# Altium PCB LTE_GPS_433_V1.0.PcbDoc (part 2 of 2)
Units mil, origin at the board's own origin, x right, y up, seen from the top; angles counter-clockwise.
Board outline 3937.01 x 2362.2 mil, 4 copper layers (Top Layer, GND, POWER, Bottom Layer); 259 components, 188 nets, 896 pads, 488 vias.
Unrouted connection lines stored in the file: 33.
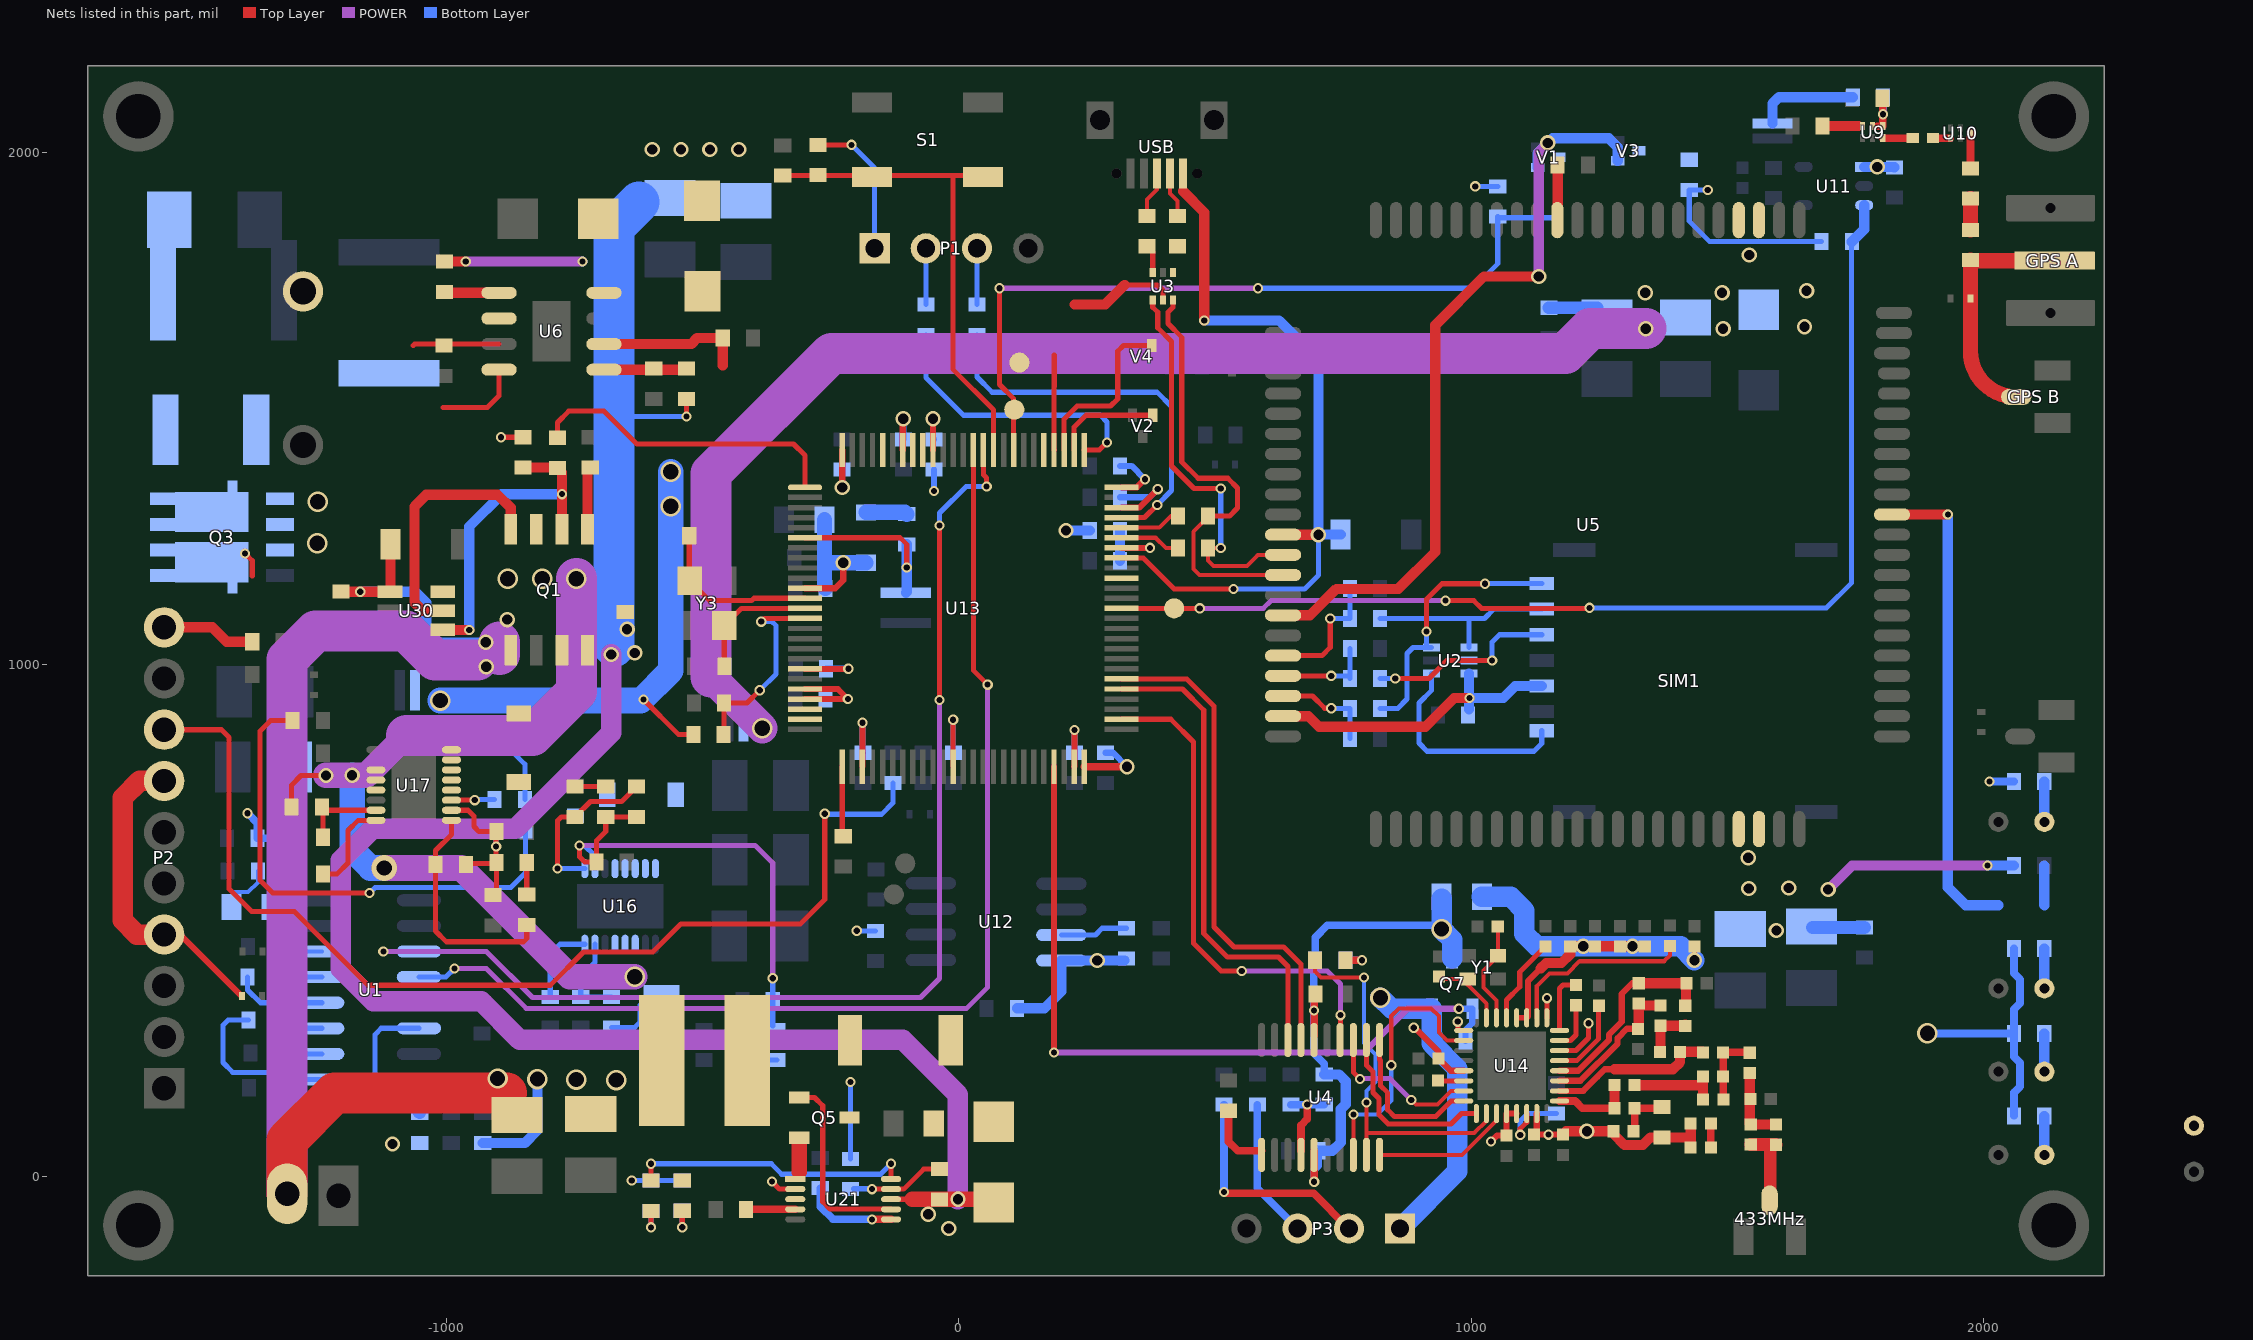
[diagram p4: the nets of this part, all layers, seen from the top]

## Via types
v1: diameter 20, hole 12, Top Layer to Bottom Layer, tented both sides, 347 vias
v2: diameter 30, hole 20, Top Layer to Bottom Layer, tented both sides, 110 vias
v3: diameter 40, hole 30, Top Layer to Bottom Layer, tented both sides, 20 vias
v4: diameter 25.98, hole 12.99, Top Layer to Bottom Layer, tented top, 8 vias
v5: diameter 16, hole 8, Top Layer to Bottom Layer, tented both sides, 1 vias
v6: diameter 50, hole 30, Top Layer to Bottom Layer, tented both sides, 1 vias
v7: diameter 59.06, hole 39.37, Top Layer to Bottom Layer, 1 vias

## Nets (pads, with @x,y where several pads share a name; then routed paths per layer and width w, separated by ;. In a path a pad name is that pad's centre, name@x,y a point inside that pad or via, vN(x,y) a via of type N, cw(c..) or ccw(c..) an arc to the next point about the centre after c; other vN are vias at no path point) (continued)
Net433_1: 433.1 R38.2 | length 79.1
  Bottom Layer w20: R38.2@2119.06,772 2119.06,693.26 433.1@2119.32,693
Net433MHz_1: 433MHz.1 C21.2 L7.1 | length 158.2
  Top Layer w25: L7.1@1546,63 1594.63,63 C21.2@1595,62.63 ; 433MHz.1@1583,-46 1584,-45 C21.2@1584,62.63
NetACPR_1: ACPR.1 R74.2 | length 64.4
  Top Layer w10: v1(-601.35,-98.65) ACPR.1@-601.35,-66.45
  Bottom Layer w10: v1(-601.35,-98.65) R74.2@-601.35,-66.45
NetACPR_2: ACPR.2 U21.10 | length 548.5
  Top Layer w10: ACPR.2@-601.35,-7.39 v1(-601.35,25.65) ; U21.10@-132.68,-4.35 v1@-132.68,25.33
  Bottom Layer w10: v1(-601.35,25.65) -366.65,25.65 -346,5 -153.33,5 v1(-132.68,25.65)
NetAdapter_1: Adapter.1 F1.1
NetBACK_1: BACK.1 R39.2 | length 76.1
  Bottom Layer w20: R39.2@2119.06,119 2119.06,43.26 BACK.1@2119.32,43
NetC2_1: C2.1 U14.31 Y1.3 | length 149.3
  Top Layer w8: C2.1@937,391 941.64,386.36 Y1.3@993.47,386.36 993.47,374.32 1029.79,338 U14.31@1029.79,310.5
NetC3_1: C3.1 U14.30 Y1.1 | length 215.9
  Top Layer w8: 1024,374.22 1024,389 ; U14.30@1049.47,310.5 1049.47,344.53 1024,370 1024,389 ; C3.1@1052,489 1052.53,488.47 Y1.1@1052.53,431.64 1024,403.11 1024,389
NetC4_1: C4.1 U14.29 | length 170.9
  Top Layer w10: U14.29@1069.16,310.5 1069.16,345.16 1095,371 1095,400 C4.1@1145,450
NetC7_1: C7.1 U14.26 | length 365.3
  Top Layer w8: U14.26@1128.21,310.5 1128.21,372.34 1152.87,397 1188,397 1212,421 1377,421 1388,432 C7.1@1388,451
NetC11_1: C11.1 U14.23 | length 109.8
  Top Layer w10: U14.23@1172.5,266.21 1194.21,266.21 1205,277 1205,312 ; 1205,297.21 1205,312 ; C11.1@1205,335 1205,312
NetC11_2: C11.2 U14.24 | length 116.9
  Top Layer w10: U14.24@1172.5,285.9 1172.5,367.5 1179.37,374.37 C11.2@1205,374.37
NetC12_2: C12.2 L1.1 L2.1 U14.20 | length 398.7
  Top Layer w12: U14.20@1172.5,207.16 1209.16,207.16 1269,267 1269,277.74 1294,302.74 1294,357.3 1314.7,378 L2.1@1327.35,378
  Top Layer w20: L2.1@1327.35,378 1416.37,378 1419.37,375 1419.37,335.37 L1.1@1418,334
NetC14_1: C14.1 U14.21 | length 159
  Top Layer w10: U14.21@1172.5,226.84 1206.22,226.84 1249,269.63 1249,333 C14.1@1250,334
NetC15_1: C15.1 L1.2 L4.2 | length 100.7
  Top Layer w20: L4.2@1368.63,244 1370,245.37 C15.1@1370,295 1415.37,295 L1.2@1418,297.63
NetC15_2: C15.2 L2.2 L3.1 U14.19 | length 296.4
  Top Layer w12: U14.19@1172.5,187.47 1213.51,187.47 1286,259.96 1286,270.7 1304.3,289 L3.1@1326,289
  Top Layer w20: L3.1@1326,289 1327.35,290.35 L2.2@1327.35,338.63 1331.61,334.37 C15.2@1370,334.37
NetC17_2: C17.2 U14.6 | length 50.3
  Top Layer w10: C17.2@935.37,188 935.9,187.47 U14.6@985.5,187.47
NetC18_1: C18.1 C20.2 L5.1 L6.2 | length 144.4
  Top Layer w15: C20.2@1492.37,151 1492,151.37 L5.1@1492,196 C18.1@1492,243 1543.37,243 L6.2@1544,242.37
NetC18_2: C18.2 L4.1 U14.18 | length 323.9
  Top Layer w12: U14.18@1172.5,167.79 1218.79,167.79 1246.19,195.19 1246.19,195.37 1260.82,210 1280,210
  Top Layer w20: 1280,210 1394,210 1408,224 L4.1@1408,244 1451.63,244 C18.2@1452.63,243
NetC19_1: C19.1 L12.1 U14.17 | length 147.3
  Top Layer w15: U14.17@1172.5,148.1 1202.9,148.1 1217,134 L12.1@1269,134
  Top Layer w20: L12.1@1280,134 C19.1@1280,179
NetC19_2: C19.2 C20.1 L5.2 | length 169.8
  Top Layer w20: C19.2@1319.37,179 1444,179 ; L5.2@1452.63,196 1452.63,151.37 C20.1@1453,151
NetC21_1: C21.1 C23.2 L6.1 L7.2 | length 150.6
  Top Layer w20: L6.1@1544,203 1544,104.37 L7.2@1546,102.37 1594.63,102.37 C21.1@1595,102
NetC33_1: C33.1 R21.1 U9.4 U9.5 | length 100.4
  Top Layer w15: 1793,2051.62 U9.4@1803.69,2051.62 C33.1@1803.69,2108
  Bottom Layer w15: v1(1804.32,2074.63) R21.1@1804.32,2108
NetC35_1: C35.1 R22.2 | length 60.6
  Top Layer w30: R22.2@1975,1849.06 C35.1@1975,1909.68
NetC35_2: C35.2 U10.1 | length 68.6
  Top Layer w15: C35.2@1975,1969.37 U10.1@1975,2038
NetC36_1: C36.1 U9.6 | length 69.3
  Top Layer w20: C36.1@1686.69,2051.62 1756,2051.62
NetC37_1: C37.1 D9.2 L9.1 U6.8 | length 269.4
  Top Layer w20: C37.1@-1004.42,1787 v1(-963,1787)
  POWER w20: v1(-963,1787) v1(-735,1787)
NetC37_2: C37.2 U6.1 | length 107.2
  Top Layer w20: C37.2@-1004.42,1727.94 -1002.47,1726 U6.1@-898.05,1726
NetC40_1: C40.1 C41.1 C161.2 D12.K L17.1 Q1.5 R27.2 U30.1 VBAT.2 | length 2783.4
  Top Layer w20: C161.2@-1207,1143.06 -1206.48,1142.53 v1(-1169,1142.53) U30.1@-1110.97,1142.53 -1109.8,1143.71 D12.K@-1109.8,1235
  Top Layer w80: VBAT.2@-1311.68,-33.06 -1311.68,71.32 -1219,164 -883,164
  POWER w80: VBAT.2@-1311.68,-33.06 -1311.68,1010.32 -1256,1066 -1080,1066 -1023,1009 -940,1009 ; -897,1020 -897,1044
  Bottom Layer w20: v1(-1169,1142.53) -1061.53,1142.53 -1040,1121 -1040,1065 -1017.73,1042.73 -925.27,1042.73 v2(-924,1044) ; R27.2@-930,65.94 -848.06,65.94 -823,91 v3(-823,191)
  other v2: -923,996 -882,1088
  other v3: -669,189 -747,190 -901,192
NetC49_2: C49.2 U13.73 | length 165.6
  Top Layer w12: U13.73@317.37,1306.85 352.15,1306.85 v1(388,1342.7)
  Bottom Layer w12: C49.2@314.37,1327 372.3,1327 v1(388,1342.7)
NetC50_2: C50.2 U13.49 | length 115.9
  Top Layer w12: U13.49@224.85,800.95 225.32,801.41 v1(225.32,872.32)
  Bottom Layer w12: C50.2@225.32,828 v1(225.32,872.32)
NetC63_1: C63.1 Q3.1 Q3.2 Q3.3 U6.2
  other v3: -1253,1237 -1252,1318
NetC64_1: C64.1 U1.1 | length 334.3
  Bottom Layer w10: C64.1@-1387,306 -1427,306 -1437,296 -1437,223 -1418,204 -1307,204 -1293,190 U1.1@-1243.49,190
NetC64_2: C64.2 U1.3 | length 91.1
  Bottom Layer w10: C64.2@-1327.94,306 -1306,306 -1290,290 U1.3@-1243.49,290
NetC65_1: C65.1 U1.4 | length 180.9
  Bottom Layer w10: C65.1@-1389,390 -1389,365 -1364,340 U1.4@-1243.49,340
NetC65_2: C65.2 U1.5 | length 86.5
  Bottom Layer w10: C65.2@-1329.94,390 U1.5@-1243.49,390
NetC66_1: C66.1 U1.2 | length 81.3
  Bottom Layer w10: C66.1@-1324,242 -1322,240 U1.2@-1243.49,240
NetC67_1: C67.1 U1.6 | length 89.7
  Bottom Layer w8: C67.1@-1329,450 -1301,450 -1291,440 U1.6@-1243.49,440
NetC70_1: C70.1 U6.6 | length 290.7
  Top Layer w20: U6.6@-693.32,1626 -523,1626 -511,1638 C70.1@-461.34,1638 -461.34,1584.23
NetC73_2: C73.2 L12.2 R80.1 | length 100.3
  Top Layer w15: C73.2@1317.37,89 1319.37,91 L12.2@1319.37,134 1371,134 R80.1@1373,136
NetC74_1: C74.1 C83.1 | length 47
  Top Layer w15: C83.1@1468,57 C74.1@1468,104
NetC80_2: C80.2 R50.1 | length 71
  Bottom Layer w10: C80.2@-426.68,228 R50.1@-355.68,228
NetC81_1: C81.1 R55.1 | length 60
  Top Layer w10: R55.1@-749.68,762 C81.1@-689.69,762
NetC81_2: C81.2 C82.2 R49.1 R50.2 R58.2 U16.10 | length 987.5
  Top Layer w10: v1(-741,647) -741,625 -731,615 R58.2@-707.74,615 -707.74,656.26 -689.69,674.31 C81.2@-689.69,702.94 C82.2@-629.69,702.94
  POWER w10: v1(-741,647) -398,647 -363.68,612.68 v1(-363.68,387.68)
  Bottom Layer w10: v1(-741,647) -731,647 -710.9,626.9 U16.10@-710.9,601.82 ; R50.2@-363.68,295.05 R49.1@-363.68,344 v1(-363.68,387.68)
NetC82_1: C82.1 R55.2 U16.9 | length 328.4
  Top Layer w10: v1(-783.82,601.82) -783.82,695.18 -776.06,702.94 R55.2@-749.68,702.94 -719.63,733 -658.69,733 C82.1@-629.69,762
  Bottom Layer w10: v1(-783.82,601.82) U16.9@-730.58,601.82
NetC84_2: C84.2 R62.1 | length 992.3
  Top Layer w10: C84.2@-1301.06,891 -1344,891 -1365,870 -1365,579 -1340,554 v1(-1151,554)
  Bottom Layer w10: v1(-1151,554) -1140,565 -875,565 -846.68,593.32 R62.1@-846.68,677
NetC87_1: C87.1 R63.1 | length 63.3
  Top Layer w10: R63.1@-844.68,551 -844,551.68 C87.1@-844,614
NetC87_2: C87.2 C88.2 R61.1 R62.2 R66.2 U17.10 | length 334.1
  Top Layer w10: U17.10@-990.87,715.79 -958.79,715.79 -947,704 -947,684 -937,674 -903.74,674 v1(-903.74,645) -903.74,613 -904.74,612 C88.2@-960.63,612 ; R66.2@-910,550.06 -903.06,557 C87.2@-903.06,614
  Bottom Layer w10: R62.2@-905.74,677 -903.74,675 v1(-903.74,645)
NetC88_1: C88.1 R63.2 U17.9 | length 445.1
  Top Layer w10: U17.9@-990.87,696.1 -990.87,668.13 -1022,637 C88.1@-1022,610 -1022,480 -1001,459 -850,459 -844,465 R63.2@-844,491.94
NetC93_1: C93.1 D3.2 F1.2 Q3.5 Q3.6 Q3.7 Q3.8 | length 49.8
  Top Layer w10: v1(-1394,1217) -1380.06,1203.06 -1380.06,1173
NetC105_2: C105.2 D11.2 R71.2
NetC106_1: C106.1 R72.2 U21.9 | length 183.1
  Top Layer w10: v1(-169.97,-24.03) U21.9@-132.68,-24.03 -108.03,-24.03 -69,15 C106.1@-38,15
  Bottom Layer w10: R72.2@-205.63,-23.35 v1@-170.65,-23.35
NetC107_2: C107.2 U21.4 | length 96.5
  Top Layer w15: C107.2@-415.94,-64 -415.35,-63.4 U21.4@-319.68,-63.4
NetCE_1: CE.1 R25.1 U11.3 U13.63 | length 2205.7
  Top Layer w10: U13.63@317.37,1110 CE.1@420,1110 v1(470,1110) ; v1(950,1125) 1005,1125 1020,1110 v1@1231,1110
  POWER w10: v1(470,1110) 594,1110 609,1125 v1(950,1125)
  Bottom Layer w10: v1(1231,1111) 1694,1111 1743,1160 1743,1825.68 R25.1@1743.32,1826
  Bottom Layer w20: R25.1@1743.32,1826 1767.42,1850.11 U11.3@1767.42,1897.2
NetCHG_1: CHG.1 R73.2 | length 64.7
  Top Layer w10: v1(-540.43,-98.57) CHG.1@-540.43,-66.22
  Bottom Layer w10: v1(-540.43,-98.57) R73.2@-540.43,-66.22
NetCHG_2: CHG.2 U21.3 | length 77.6
  Bottom Layer w20: 2119.06,608 2119.06,530.76 2119.32,530.5
NetD2_K: D2.K U5.11 U13.68 USB.1 | length 1512.1
  Top Layer w10: U13.68@317.37,1208.43 360,1208.43 420.42,1148 v1(536,1148) ; 437.68,1924.32 USB.1@437.68,1959
  Top Layer w20: 437.68,1924.32 479,1883 v1(479,1672) ; U5.11@632.84,1253.8 v2(701.8,1253.8)
  Bottom Layer w10: v1(536,1148) 675,1148 701.8,1174.8 v2(701.8,1253.8)
  Bottom Layer w20: v1(479,1672) 625,1672 701.8,1595.2 v2(701.8,1253.8) 702,1254 D2.K@745.2,1254
NetD7_K: "GPS A.1" "GPS B.1" D7.K R22.1 | length 481.3
  Top Layer w30: R22.1@1975,1790 1975,1612.32 ccw(c2064.32,1612.32) 2064.32,1523 ; R22.1@1976,1789 2139.32,1789
NetD8_2: D8.2 R29.1 | length 81.1
  Bottom Layer w30: D8.2@-181.68,1297.43 -105.43,1297.43 R29.1@-102,1294
NetFB1_1: FB1.1 U1.16 | length 65.6
  Bottom Layer w25: U1.16@-1054.51,190 -1054.51,126.51 FB1.1@-1053,125
NetGPS_1: GPS.1 R37.2 | length 78.1
  Bottom Layer w20: R37.2@2119.06,446 2119.06,368.26 GPS.1@2119.32,368
NetIRQ_1: IRQ.1 R70.2 | length 65.1
  Top Layer w15: IRQ.1@754.43,423 v1(787,423)
  Bottom Layer w15: R70.2@754.43,423 v1(787,423)
NetL8_1: L8.1 U9.3 | length 58.6
  Top Layer w15: U9.3@1803.69,2028 L8.1@1862.32,2028
NetL8_2: L8.2 U10.4 | length 33.8
  Top Layer w15: L8.2@1901.84,2028.16 U10.4@1935.63,2028.16
NetL10_1: L10.1 U16.15 U16.16
NetL10_2: L10.2 U16.12 U16.13 U16.14
NetL11_1: L11.1 U17.15 U17.16
NetL11_2: L11.2 U17.12 U17.13 U17.14
NetL17_2: L17.2 Q5.2 U21.1 | length 58.3
  Top Layer w30: L17.2@-414.68,225.72 L17.2@-413.36,227.05 ; -312,9.56 Q5.2@-312,66
NETLIGHT: 1.2 U5.51 | length 950.1
  Top Layer w20: U5.51@1821.82,1293.17 v1(1930.83,1293.17)
  Bottom Layer w20: v1(1930.83,1293.17) 1930.83,565.17 1965.5,530.5 2029.55,530.5
NetP1_1: P1.1 R17.2
NetP1_2: P1.2 R9.2 | length 109.9
  Bottom Layer w10: R9.2@-64.68,1703.06 P1.2@-64.68,1813
NetP1_3: P1.3 R10.2 | length 109.9
  Bottom Layer w10: R10.2@35.32,1703.06 P1.3@35.32,1813
NetP2_8: P2.8 R5.2 | length 2088.5
  Top Layer w10: P2.8@-1552,873 -1440,873 -1425,858 -1425,562 -1381,518 -1297.79,518 -1217,437.21 -1153.79,374 -798,374 -733,439 -598,439 -543,494 -309.68,494 -262,541.68 v1(-262,709)
  Bottom Layer w10: v1(-262,709) -261,708 -151,708 -128.69,730.31 R5.2@-128.69,768.94
NetP2_10: P2.10 R1.2 | length 183.6
  Top Layer w20: P2.10@-1552,1073 -1458,1073 -1429.76,1044.76 R1.2@-1380.06,1044.76
NetP3_1: P3.1 R18.2 | length 90.9
  Top Layer w8: 367.32,1876 367.32,1908.32 386.5,1927.5 386.5,1959
NetP3_2: P3.2 R8.2 | length 444.2
  Top Layer w15: v1(517.32,-29.68) 519.61,-31.98 692.3,-31.98 P3.2@761.32,-101
  Bottom Layer w15: v1(517.32,-29.68) R8.2@517.32,141
NetP3_3: P3.3 R11.2 | length 274.6
  Bottom Layer w15: R11.2@582.65,141 582.65,-22.33 P3.3@661.32,-101
NetPWR_1: PWR.1 R36.2 | length 74.6
  Bottom Layer w20: R36.2@2119.06,280 2119.06,205.76 PWR.1@2119.32,205.5
NetQ1_2: Q1.2 R69.1 R118.1 U30.4 | length 639.1
  Top Layer w20: U30.4@-1007.82,1067.73 v1(-956.27,1067.73) ; R69.1@-851.03,1384.94 -784.94,1384.94 R118.1@-784,1384 ; Q1.2@-775.38,1264.4 v1(-775.38,1333) R118.1@-775.38,1375.38
  Bottom Layer w20: v1(-956.27,1067.73) -956.27,1269.73 -893,1333 v1(-775.38,1333)
NetQ1_4: Q1.4 U30.5 | length 499.5
  Top Layer w20: U30.5@-1007.82,1105.13 -1047.13,1105.13 -1063,1121 -1063,1309 -1040,1332 -901,1332 -875.38,1306.38 Q1.4@-875.38,1264.4
NetQ5_1: Q5.1 U21.7 | length 379.7
  Top Layer w10: Q5.1@-312,155 -282,155 -266,139 -266,-48.69 -251.61,-63.09 -132.99,-63.09 U21.7@-132.68,-63.4
NetQ5_3: Q5.3 R71.1 R72.1 | length 150
  Bottom Layer w10: R72.1@-212,35 v1(-212,185)
NetQ7_1: Q7.1 R76.1 U13.47 | length 1518.1
  Top Layer w12: v1(185.48,243) 185.48,306 ; 185.48,266.48 185.48,306 ; U13.47@185.48,800.95 185.48,306
  POWER w12: v1(185.48,243) 791,243 876.06,328.06 v1(976,328.06)
  Bottom Layer w12: v1(976,328.06) Q7.1@1002.32,328.06 1002.32,300.32 989,287 R76.1@989,265
NetR2_1: R2.1 SIM1.3 U2.3 | length 533.5
  Top Layer w10: v1(912.9,1064.9) 912.9,1127.9 943,1158 v1(1027,1158)
  Bottom Layer w10: R2.1@822.32,914.6 853,914.6 856.6,914.6 875,933 875,1022 886.59,1033.59 U2.3@912.9,1033.59 ; v1(912.9,1064.9) U2.3@912.9,1033.59 ; U2.3@922.9,1033.59 U2.3@912.9,1033.59 ; v1@1027.4,1158.4 SIM1.3@1138,1158.4
NetR3_2: R3.2 U5.72 | length 108.3
  Top Layer w20: U5.72@1168.28,1867.98 1168.94,1868.65 R3.2@1168.94,1976
NetR4_1: R4.1 R30.1 U13.69 | length 173.5
  Top Layer w12: U13.69@317.37,1228.11 v1(373.11,1228.11)
  Bottom Layer w12: 314.37,1228 314.48,1228.11 v1(373.11,1228.11)
  Bottom Layer w20: R30.1@314.37,1203 314.37,1228 R4.1@314.37,1262
NetR14_2: R14.2 U1.14 | length 408
  Bottom Layer w10: R14.2@-1326.94,174 -1301.94,149 -1155,149 -1140,164 -1140,278 -1128,290 U1.14@-1054.51,290
NetR15_2: R15.2 U1.13 | length 123.9
  Bottom Layer w10: U1.13@-1054.51,340 -931.94,340 R15.2@-931,339.06
NetR16_1: R16.1 SIM1.2 U2.5 | length 421.3
  Top Layer w10: v1(851.8,973.2) 917.52,973.2 952.32,1008 v1(1041,1008) v1@1045,1008
  Bottom Layer w10: R16.1@822.32,973.2 v1(851.8,973.2) ; U2.5@995.73,1008 v1(1041,1008) 1041,1044 1055.4,1058.4 SIM1.2@1138,1058.4
NetR19_1: R19.1 SIM1.7 U2.4 | length 380
  Bottom Layer w10: R19.1@822.32,1090.4 995.73,1090.4 ; U2.4@995.73,1033.59 995.73,1090.4 ; SIM1.7@1138,1108.4 1097,1108.4 1044,1108.4 1026,1090.4 995.73,1090.4
NetR20_1: R20.1 U13.70 | length 118.1
  Top Layer w8: U13.70@317.37,1247.8 384.21,1247.8 404,1228 R20.1@427.32,1228
NetR23_1: R23.1 U13.71 | length 121.3
  Top Layer w8: U13.71@317.37,1267.48 391.11,1267.48 413.63,1290 R23.1@427.32,1290 R23.1@429.32,1290
NetR24_2: R24.2 S_RX.1 U13.83 V1.3 | length 1532.1
  Top Layer w10: v1@80,1736 v1(79,1735) 79,1547 106.74,1519.26 U13.83@106.74,1419.05
  POWER w10: v1(79,1735) v1@584.06,1735
  Bottom Layer w10: v1@584,1735 v1(584.06,1735.06) 1004.06,1735.06 1052,1783 R24.2@1052,1874.94 1054.37,1872.57 1169.37,1872.57
NetR26_2: R26.2 U12.7 | length 132.5
  Bottom Layer w10: U12.7@199.89,472.32 266.32,472.32 279.31,485.31 R26.2@327,485.31
NetR28_2: R28.2 S_TX.1 U13.80 V3.3 | length 186.9
  Top Layer w10: 186,1419.57 185.48,1419.05 185.48,1542.48 186,1543 186,1605
NetR29_2: R29.2 SB.2 U13.6 | length 344.2
  Top Layer w10: U13.6@-300.74,1247.8 -114.85,1247.8 -102,1234.94 v1(-102,1190)
  Bottom Layer w20: SB.2@-103.68,1140.5 -102,1142.18 R29.2@-102,1234.94
NetR31_1: R31.1 U13.37 | length 156.1
  Top Layer w10: U13.37@-11.37,800.95 v1(-11.37,892.37)
  Bottom Layer w10: v1(-11.37,892.37) -11.37,828.68 R31.1@-10.69,828
NetR32_1: R32.1 U13.91 | length 102.3
  Top Layer w12: U13.91@-50.74,1419.05 v2(-50.74,1480.26)
  Bottom Layer w12: v2(-50.74,1480.26) -50.74,1442.05 R32.1@-48.68,1440
NetR33_1: R33.1 U13.94 | length 100.5
  Top Layer w12: U13.94@-109.8,1419.05 v2@-109.8,1479.2
  Bottom Layer w12: R33.1@-108.68,1440 v2(-108.68,1480.32)
NetR42_1: R42.1 R64.1 U6.5 | length 159.5
  Top Layer w20: U6.5@-693.32,1576 R42.1@-533.8,1576
NetR44_2: R44.2 U6.4 | length 339.1
  Top Layer w10: -1065.68,1623 -1062.68,1626 -898.05,1626 ; -1007.68,1502 -921,1502 -898.05,1524.95 U6.4@-898.05,1576
NetR48_1: R48.1 R59.2 U17.7 | length 168.8
  Top Layer w10: R48.1@-1242,655 -1242,719 -1238.79,715.79 U17.7@-1138.5,715.79
NetR51_2: R51.2 R56.1 U16.7 | length 174.3
  Bottom Layer w10: U16.7@-710.9,454.18 -710.9,419.1 -738.43,391.57 R56.1@-738.43,351 R51.2@-678.69,351
NetR52_1: R52.1 U13.26 | length 136.7
  Top Layer w10: U13.26@-227.91,800.95 -227.91,666.91 R52.1@-226,665
NetR57_1: R57.1 U16.8 | length 159.4
  Bottom Layer w10: R57.1@-798.18,351 -798.18,434.82 -778.82,454.18 U16.8@-730.58,454.18
NetR60_2: R60.2 U17.11 | length 84.8
  Top Layer w10: U17.11@-990.87,735.47 v1(-945.53,735.47)
  Bottom Layer w10: v1(-945.53,735.47) -944,737 R60.2@-906.74,737
NetR65_1: R65.1 U17.8 | length 183.9
  Top Layer w10: R65.1@-1242,591 -1215,591 -1193,613 -1193,676 -1172.9,696.1 U17.8@-1138.5,696.1
NetR68_1: R68.1 U4.1 | length 132.6
  Top Layer w15: R68.1@526.32,129 526.32,68.68 544.2,50.8 U4.1@591.16,50.8
NetR75_2: R75.2 U21.6 | length 184.7
  Top Layer w15: v1(-169.91,-83.09) U21.6@-132.68,-83.09
  Bottom Layer w15: R75.2@-271,-22.06 -271,-58 -245.91,-83.09 v1(-169.91,-83.09)
NetR79_1: R79.1 U14.14 | length 150.9
  Top Layer w10: v1(1096,82) 1096,94 1108.53,106.53 U14.14@1108.53,123.5
  Bottom Layer w10: v1(1096,82) 1096,109 1111,124 R79.1@1167,124
NetR118_2: R118.2 U13.1 | length 620.6
  Top Layer w10: R118.2@-784,1443.06 -784,1473 -762,1495 -693,1495 -629,1431 -323,1431 -300.74,1408.74 U13.1@-300.74,1346.22
NetSIM1_8: SIM1.8 U2.1 | length 423.6
  Bottom Layer w10: U2.1@922.9,982.41 922.9,949.9 898,925 898,847 914,831 1123,831 1138,846 SIM1.8@1138,871
NetU1_11: U1.11 U13.86 | length 2305.3
  Top Layer w10: v1(-38,931) v1(-38,1272) ; U13.86@47.68,1419.05 47.68,1370.84 54,1364.53 v1(54,1348) v1@55,1348
  POWER w10: v1(-1124,440) -923,440 -833,350 -75,350 -38,387 v1(-38,931)
  Bottom Layer w10: v1(-1124,440) U1.11@-1054.51,440 ; v1(-38,1272) -38,1296 14,1348 v1(54,1348)
NetU1_12: U1.12 U13.87 | length 2227.5
  Top Layer w10: U13.87@28,1419.05 28,989 v1(56,961)
  POWER w10: v1(-985,407) -923,407 -845,329 15,329 56,370 v1(56,961)
  Bottom Layer w10: U1.12@-1054.51,390 -1002,390 v1(-985,407)
NetU3_1: U3.1 USB.2 | length 55.9
  Top Layer w10: 367.32,1816.94 378.32,1805.94 378.32,1765.57
NetU3_3: U3.3 USB.3 | length 88.9
  Top Layer w8: 412.09,1959 412.09,1919.91 426.32,1905.68 426.32,1876
NetU4_14: U4.14 U13.52 | length 972.9
  Top Layer w10: U13.52@317.37,893.47 413.54,893.47 458,849 458,456 512,402 v1(552,402) ; U4.14@744.7,275.2 v1(744.7,315.7)
  POWER w10: v1(552,402) 719,402 744.7,376.3 v1(744.7,315.7)
NetU4_17: U4.17 U13.56 | length 973.7
  Top Layer w10: U13.56@317.37,972.2 444.79,972.2 498,919 498,488 537,449 634,449 667.93,415.07 U4.17@667.93,275.2
NetU4_18: U4.18 U13.55 | length 940.1
  Top Layer w10: U13.55@317.37,952.52 436.48,952.52 478,911 478,475.34 524,429.34 623.66,429.34 642.34,410.66 U4.18@642.34,275.2
NetU13_23: U13.23
NetU13_24: U13.24
NetU13_77: U13.77 V2.1 | length 207.8
  Top Layer w10: U13.77@224.85,1419.05 224.85,1463.85 248,1487 V2.1@378.32,1487
NetU13_78: U13.78 V4.1 | length 345.3
  Top Layer w10: U13.78@205.16,1419.05 205.16,1479.16 231,1505 296,1505 310,1519 310,1612 321,1623 V4.1@376.32,1623
NetU13_79: U13.79
NetU13_92: U13.92
NetU13_93: U13.93
NetU13_96: U13.96
NRST: C59.2 R6.1 U13.14 | length 400.9
  Top Layer w10: R6.1@-459.68,864 -458.63,865.06 C59.2@-458.63,925 -414,925 v1(-389,950) ; v1(-386,1084) -379.68,1090.32 U13.14@-300.74,1090.32
  Bottom Layer w10: v1(-389,950) -357,982 -357,1076 -365,1084 v1(-386,1084)
NRST2: C89.1 R67.2 U4.4 | length 160.5
  Top Layer w15: U4.4@667.93,50.8 667.93,100.93 680,113 v1(680,141)
  Bottom Layer w15: C89.1@647.98,141 R67.2@713.31,141
OSC_IN: C58.2 U13.12 Y3.3 | length 331.4
  Top Layer w10: C58.2@-526.74,1251.81 -526.74,1164.87 Y3.3@-525.68,1163.81 -486.87,1125 -405,1125 -400.32,1129.68 U13.12@-300.74,1129.68
OSC_OUT: C60.2 U13.13 Y3.1 | length 251
  Top Layer w10: C60.2@-457.94,997 -458.22,997.28 Y3.1@-458.22,1076.5 -424.72,1110 U13.13@-300.74,1110
POWER: C69.1 C75.1 C162.2 Q1.1 Q1.3 R51.1 R54.1 R59.1 R60.1 U16.3 U16.4 U16.5 U17.3 U17.4 U17.5 U30.6 | length 2336.7
  Top Layer w10: R59.1@-1303,722 -1303,765 -1284.5,783.5 v2(-1236,783.5)
  Top Layer w20: Q1.1@-725.38,1264.4 C162.2@-725.38,1379.6
  POWER w50: v2@-1236,784 v2(-1185,784) -1157,784 -1079,862 ; v6(-1122,603) -972,603 -760,391 v3(-633,391)
  POWER w80: -1079,862 -833,862 -747,948 v3(-747,1168)
  Bottom Layer w10: v2(-1185,784) -1142,784 -1097,829 -871,829 -847.68,805.68 R60.1@-847.68,737 ; R51.1@-678.69,291.94 -633.06,291.94 -623,302 -623,335
  Bottom Layer w50: v2(-1185,784) -1185,639 -1149,603 v6(-1122,603)
  other v3: -881,1168 -814,1168
POWER_STATE: U13.66
PWR_KEY: C1.1 R78.2 S1.1 U13.85 | length 959.9
  Top Layer w10: C1.1@-344,1955 -169.68,1955 -13,1955 43.85,1955 S1.1@46.85,1952 ; -12,1954 -12,1577 67.37,1497.63 U13.85@67.37,1419.05
RF_IRQ: IRQ.2 U4.9 U14.10 | length 739.7
  Top Layer w8: IRQ.2@695.37,423 695.37,400.63 707,389 v1(791,389) ; U4.9@795.57,42.8 795.57,81.57 ; 795.88,81.88 v1(795.88,145) ; 799.26,85.26 1006,85.26 1029.79,109.05 U14.10@1029.79,123.5
  Bottom Layer w8: v1(791,389) 791,261 813,239 813,185 795.88,167.88 v1(795.88,145)
RF_RST: U4.8 U14.2 | length 522.4
  Top Layer w8: U4.8@770.29,50.8 v1(770.29,121.71) ; v1(844,218) 844,247 ; 844,238 844,247 ; U14.2@985.5,266.21 952.79,266.21 937,282 937,314 922,329 859,329 844,314 844,247
  Bottom Layer w8: v1(770.29,121.71) 816.71,121.71 844,149 v1(844,218)
SIMC_CLK: C28.1 R2.2 U5.19 | length 198.5
  Top Layer w10: U5.19@632.84,938.84 690.16,938.84 714,915 v1(727,915)
  Bottom Layer w10: v1@727.4,914.6 R2.2@763.26,914.6 C28.1@763.26,856
SIMC_DATA: C29.1 R19.2 U5.17 | length 251.4
  Top Layer w10: U5.17@632.84,1017.58 708.58,1017.58 725,1034 v1(725,1090)
  Bottom Layer w10: v1@725.4,1090.4 R19.2@763.26,1090.4 C29.1@763.26,1149
SIMC_RST: C27.1 R16.2 U5.18 | length 184.3
  Top Layer w10: U5.18@632.84,978.21 v1(726.79,978.21) v1@727,978
  Bottom Layer w10: v1(726.79,978.21) R16.2@758.25,978.21 ; R16.2@763.26,973.2 C27.1@763.26,1031.8
SPI_MISO: U4.12 U14.9 | length 362.4
  Top Layer w10: U4.12@795.57,267.2 795.57,217.72 808.14,205.14 808.14,164.86 820,153 820,121 838,103 960.5,103 981,123.5 U14.9@1010.1,123.5
SPI_MOSI: U4.13 U14.7 | length 316.7
  Top Layer w8: v1(883,150) 892,141 934.1,141 960.89,167.79 U14.7@985.5,167.79
  Top Layer w10: U4.13@769.98,267.2 769.98,204.02 v1(783,191)
  POWER w10: v1(783,191) 784,192 841,192 v1(883,150)
SPI_NSS: U4.10 U14.11 | length 270.3
  Top Layer w8: U4.10@821.47,43.11 U4.10@821.16,42.8 982.55,42.8 1049.47,109.71 U14.11@1049.47,123.5
SPI_SCK: U4.11 U14.8 | length 309.1
  Top Layer w10: U4.11@821.16,267.2 821.16,229 823.14,227.02 823.14,177.86 837,164 837,131 850,118 930.9,118 961,148.1 U14.8@985.5,148.1
SWCLK: R9.1 U13.76 | length 670.6
  Top Layer w10: U13.76@244.54,1419.05 274.05,1419.05 v1(289,1434)
  Bottom Layer w10: R9.1@-64.68,1644 -64.68,1560.68 9,1487 141,1487 ; 248,1487 141,1487 ; v1(289,1434) 289,1474 276,1487 141,1487
SWDIO: R10.1 U13.72 | length 769.4
  Top Layer w10: U13.72@317.37,1287.16 362.17,1287.16 v1(387,1312)
  Bottom Layer w10: R10.1@35.32,1644 35.32,1561.68 65,1532 387,1532 415,1504 415,1340 v1(387,1312)
USB_D_N: R20.2 U3.6 U5.12 | length 778.3
  Top Layer w8: v1(511,1228) R20.2@486.37,1228 486.37,1203.63 496.94,1193.06 562.06,1193.06 583.43,1214.43 U5.12@632.84,1214.43
  Top Layer w10: 378.32,1712 378.32,1698 388.16,1688.16 388.16,1657.72 415,1630.87 415,1387.72 458.72,1344 v1(511,1344)
  Bottom Layer w10: v1(511,1228) v1(511,1344)
USB_D_P: R23.2 U3.4 U5.13 | length 859.9
  Top Layer w8: R23.2@488.37,1290 458,1259.63 458,1187 469.94,1175.06 U5.13@632.84,1175.06
  Top Layer w10: 418,1712 418,1698 408.16,1688.16 408.16,1666 435,1639.16 435,1396 467,1364 525,1364 544,1345 544,1306 528,1290 488.37,1290 R23.2@486.37,1290
USB_VBUS: U3.5 | length 214.4
  Top Layer w10: 323.57,1741.57 387.43,1741.57 398.16,1730.84 ; 398.16,1728.37 398.16,1730.84 ; U3.5@398.32,1712 398.16,1712.16 398.16,1730.84
  Top Layer w20: 225.37,1703.43 285.43,1703.43 323.57,1741.57
VCC_ANTENA_1.8V: 1.8V.2 R21.2 | length 201
  Bottom Layer w20: 1.8V.2@1588.32,2056.53 1588.32,2095.31 1601,2108 R21.2@1745.26,2108
VCC_DEV: D13.2 F2.2 P2.4 P2.7 R34.2 | length 703.5
  Top Layer w12: P2.4@-1552,473 -1520.37,473 D13.2@-1400.37,353
  Top Layer w40: P2.4@-1552,473 -1605,473 -1633,501 -1633,740 -1600,773 P2.7@-1552,773
  Bottom Layer w8: -1415,556 -1388,556 -1368.94,575.06 R34.2@-1368.94,597
VCC_LTE_3.8V: 3.8V.2 C22.1 C25.1 C26.1 C30.1 C31.1 C32.1 D1.2 R35.1 U5.38 U5.39 U5.62 U5.63 | length 3059.4
  POWER w20: v2(1697,561) 1744,608 v1(2008,608)
  POWER w60: -484,976 v3(-384,876)
  POWER w80: -484,976 -484,1373 -249,1608 1184,1608 1232,1656 v2(1341,1656)
  Bottom Layer w20: v1(2008,608) R35.1@2060,608
  Bottom Layer w25: C26.1@1152,1697 C22.1@1246.32,1697 ; C31.1@1666.32,487 C32.1@1768.32,487
  other v2: 1596,481 1542,563 1620,564 1541,623 1492,1656 1651,1660 1340,1726 1490,1726 1655,1730 1543,1800
VCC_MCU2_3.3V: C90.2 C91.2 FB5.2 Q7.3 R67.1 R70.1 U4.5 U4.16 | length 1086.6
  Top Layer w15: v1(693.52,-9.48) U4.5@693.52,50.8 ; U4.16@693.52,275.2 693.52,357.26 C91.2@694.26,358
  Bottom Layer w15: R70.1@693,420.63 v1(693,325) 693,241 713.31,220.69 R67.1@713.31,200.06 ; v1(693.52,-9.48) 693.52,13.52 701.39,21.39 C90.2@701.39,50.8 ; R70.1@695.37,423 695.37,467.37 719,491 935,491 v3(942.22,483.78)
  Bottom Layer w20: C90.2@701.39,50.8 729,50.8 745.29,67.09 745.29,132.06 755,141.77 755,187 741.94,200.06 R67.1@713.31,200.06
  Bottom Layer w40: FB5.2@942.22,542.96 v3(942.22,483.78) 962.94,463.06 Q7.3@962.94,426.48
VCC_MCU_3.3V: 3.3V.2 C43.2 C47.1 C48.1 C51.2 C52.2 C53.2 C54.2 C55.2 C56.2 C57.1 C62.2 C68.2 D8.1 F2.1 FB1.2 Q7.2 R4.2 R6.2 R17.1 R18.1 R24.1 R25.2 R26.1 R28.1 R32.2 R36.1 R37.1 R38.1 R39.1 R40.2 R69.2 R76.2 R78.1 U11.1 U12.8 U13.11 U13.19 U13.21 U13.22 U13.28 U13.50 U13.75 U13.100 | length 4886.8
  Top Layer w10: v1(-894,1444) R69.2@-851.03,1444 ; v1(-616,932) -548,864 R6.2@-518.74,864 ; R78.1@-275,2015 v1(-210,2015)
  Top Layer w12: U13.22@-300.74,932.84 v1@-217.16,932.84 ; U13.21@-300.74,952.52 -236.85,952.52 v1@-217.16,932.84 ; U13.19@-300.74,991.89 -216.11,991.89 v1(-216,992) ; U13.11@-300.74,1149.37 -241.63,1149.37 -226,1165 v2(-226,1199) ; v2(-227.91,1345.91) U13.100@-227.91,1419.05 ; v1(-217,933) v1@-217.16,932.84 ; U13.28@-188.53,800.95 v1(-188.53,886.53) ; U13.75@317.37,1346.22 347.22,1346.22 v1(363,1362)
  Top Layer w15: U13.50@244.54,800.95 v2(327.95,800.95)
  Bottom Layer w10: v1(-210,2015) -164.68,1969.68 -164.68,1813 ; v1(-199.63,480.37) R40.2@-163,480.37 ; R26.1@323.06,422.32 R26.1@327,426.26 ; v1(1008,1934) R24.1@1052,1934 ; v1(1461.94,1926.94) 1426,1926.94 1426,1866 1466,1826 R25.2@1684.26,1826
  Bottom Layer w12: C55.2@-260.63,933 v1(-217,933) ; C54.2@-259.63,992 v1(-216,992) ; C53.2@-228.68,1380.94 -228.68,1346.68 v2(-227.91,1345.91) ; v1(-188.53,886.53) -188.53,828.85 C47.1@-187.68,828 ; v1(-48.68,1339.32) R32.2@-48.68,1380.94 ; C56.2@286.32,828 300.89,828 v2(327.95,800.95) ; C52.2@314.37,1388 337,1388 v1(363,1362)
  Bottom Layer w15: v1(-1389,710) -1369.94,690.94 C68.2@-1369.94,661 -1335,661 -1320,646 -1320,580 -1342,558 F2.1@-1342,527 ; v3(1891,280) R36.1@2060,280 ; v1(2012,772) R38.1@2060,772 ; R39.1@2060,119 2060,164.55 2071.74,176.29 2071.74,222.97 2060,234.71 R36.1@2060,280 ; R37.1@2060,446 2060,397.21 2071.74,385.47 2071.74,338.79 2060,327.05 R36.1@2060,280
  Bottom Layer w20: C62.2@113.06,329 167,329 199.89,361.89 U12.8@199.89,422.32 R26.1@323.06,422.32 ; v2(209,1262) R4.2@255.32,1262 ; U11.1@1767.42,1972 1825.37,1972 C43.2@1826.32,1971.06
  Bottom Layer w30: C57.1@-262.68,1283 -262.68,1199 -262.68,1151 C48.1@-260.68,1149 ; C51.2@-252.63,1199 D8.1@-181.68,1199
  Bottom Layer w40: v3(823,350) 844.94,328.06 Q7.2@923.57,328.06 923.57,260.43 973,211 973,10.68 861.32,-101
  Bottom Layer w50: v3(-1013,930) -621,930 -563,988 ; -563,1089 -563,988 ; v3(-563,1377) -563,988
  other v2: -1106,64 270,422.32 1793,1972
  other v3: -563,1309
VCC_OUT: C34.1 C61.1 C106.2 C160.2 D11.1 L9.2 Q1.7 Q1.8 R42.2 R73.1 R74.1 U21.2 U21.8 | length 3920.4
  Top Layer w10: v1(-531.8,1484.8) R42.2@-531.8,1518.94 ; v1(-365.34,-9.35) -350.66,-24.03 U21.2@-319.68,-24.03 ; U21.8@-132.68,-43.72 -91,-43.72 ; D11.1@61.72,-43.72 D11.1@68,-50
  Top Layer w30: -91,-43.72 v2(-2,-43.72) D11.1@61.72,-43.72
  POWER w40: v2(-679,1020) -679,867 -866,680 -1145,680 -1207,618 -1207,406 -1144,343 -933,343 -858,268 -110,268 -2,160 v2(-2,-43.72)
  Bottom Layer w10: -669.2,1484.8 v1(-531.8,1484.8) ; v1(-639,-7) -601.74,-7 R74.1@-601.35,-7.39 -540.66,-7.39 R73.1@-540.43,-7.16
  Bottom Layer w80: -674,1035 -674,1854 -625,1903
  other v2: -20,-101 -60,-73 -633,1023 -648,1069 -599,2006 -542.67,2006 -486.33,2006 -430,2006
VDD_1V8: U5.15 V1.1 V3.1 | length 1531.1
  Top Layer w20: U5.15@632.84,1096.32 685.32,1096.32 737,1148 858,1148 930,1220 930,1663 1025,1758 v2(1132,1758)
  POWER w20: v2(1132,1758) 1132,2001 v2(1149.8,2018.8)
  Bottom Layer w20: V1.1@1130,1971 1130,1999 1159,2028 1269,2028 1286.32,2010.69 V3.1@1286.32,1984
VDD_RF: C5.1 C6.1 C8.1 C9.2 C13.1 C16.2 C24.2 C46.2 C72.2 C73.1 C74.2 C83.2 FB5.1 R80.2 U14.1 U14.5 U14.12 U14.13 U14.15 U14.22 U14.25 U14.27 U14.28 | length 1711.5
  Top Layer w10: v1(974,303) 974,285.9 U14.1@985.5,285.9 ; U14.28@1088.84,310.5 U14.27@1108.53,310.5 ; U14.25@1147.9,325.1 U14.25@1147.9,310.5 v1(1147.9,348.9) ; U14.22@1172.5,246.53 1204.69,246.53 1229,270.84 v1(1229,300) ; v2(1436,423) C8.1@1436,450
  Top Layer w12: v1(888,291) 890,291 936.37,244.63 C72.2@936.37,231 960.21,207.16 U14.5@985.5,207.16 ; v1(1039,69) 1050.37,80.37 C24.2@1068.75,80.37 1069.16,80.78 U14.12@1069.16,123.5 U14.13@1088.84,123.5 ; U14.27@1108.53,310.5 1111,312.98 1111,382 1136,407 ; U14.15@1128.21,123.5 1128.21,87.58 C16.2@1123,82.37 v1(1151,82.37) C46.2@1179,82.37
  Top Layer w20: 1136,407 1146.5,417.5 1176.5,417.5 1193.5,434.5 C13.1@1193.5,450 C9.2@1242,450 C5.1@1290.5,450 C6.1@1339,450 ; C46.2@1179,82.37 1185.63,89 C73.1@1278,89 1278,83.53 1299.35,62.19 1335.39,62.19 1350.15,76.94 R80.2@1373,76.94 1428.57,76.94 ; C83.2@1428.63,57 C74.2@1428.63,104
  Bottom Layer w40: FB5.1@1021,547 1077,547 1104,520 1104,474.5 1128.5,450 v2(1219,450) v2(1315,450) 1409,450 v2(1436,423)
  other v2: 1226,89
VSIM: C10.2 SIM1.1 U2.6 U5.20 | length 616.6
  Top Layer w20: U5.20@632.84,899.47 682.53,899.47 703,879 911,879 967,935 v1(997,935)
  Bottom Layer w20: C10.2@995.73,912.32 U2.6@995.73,982.41 ; v1(997,935) 1062.6,935 1086,958.4 SIM1.1@1138,958.4
pads on no net: Q1.6 U1.7 U1.8 U1.9 U1.10 U4.2 U4.3 U4.6 U4.7 U5.6 U5.7 U5.8 U5.9 U5.16 U5.21 U5.22 U5.23 U5.24 U5.25 U5.26 U5.27 U5.28 U5.29 U5.30 U5.31 U5.32 U5.33 U5.34 U5.35 U5.36 U5.42 U5.44 U5.45 U5.46 U5.47 U5.48 U5.49 U5.50 U5.52 U5.53 U5.54 U5.55 U5.56 U5.59 U5.66 U5.67 U5.69 U5.70 U5.73 U5.74 U5.75 U5.76 U5.83 U5.84 U5.85 U5.86 U5.87 U6.3 U11.4 U13.2 U13.3 U13.4 U13.5 U13.7 U13.8 U13.9 U13.15 U13.25 U13.34 U13.35 U13.36 U13.38 U13.40 U13.41 U13.42 U13.43 U13.44 U13.45 U13.46 U13.51 U13.53 U13.54 U13.60 U13.61 U13.62 U13.64 U13.65 U13.67 U13.81 U13.82 U13.84 U13.88 U13.89 U13.90 U13.95 U13.97 U13.98 U14.3 U14.4 U14.16 U14.32 USB.0 USB.6 USB.7
copper on no net: | length 2356.2
  Top Layer w10: 120,1627 120,1617 ; v1(120,1709) 120,1617 ; 165.8,1419.05 165.8,1496.2 120,1542 120,1617 ; 418,1765.57 418,1808.63 426.32,1816.94
  Top Layer w15: 244.37,1543 244.37,1562.37 264.74,1582.74 264.74,1605 264.74,1649.74 286,1671 v1(325,1671)
  Top Layer w20: -467.57,1518.94 -403.34,1518.94
  POWER w10: v1(120,1709) 613,1709 641,1737 v1(641,2073)
  Bottom Layer w10: v1(641,2073) 1349,2073 1365.06,2056.94 1365.06,1984
  Bottom Layer w20: 1365.06,1984 1424,1984 1426,1986

## Polygon pours and split planes (outlines as drawn)
VCC_MCU_3.3V on POWER "POWER-No Net" (solid, remove dead copper, pour order 1000): -1783.27,2246.45 -1754.27,2275.45 2322.73,2275.45 2322.73,-173.55 2255.73,-240.55 2236.73,-259.55 -1783.27,-259.55 -1783.27,2256.45 -1762.27,2277.45
VDD_RF on POWER "POWER-No Net" (solid, remove dead copper, pour order 1000): 1087.8,475 1088.96,476 1330.23,476 1445.67,476 1483.76,443 1493,435 1493,84 1493,78 1461.83,51 1452.6,43 896.17,43 896.17,262 871.93,283 865,289 865,352 865,446 899.63,476 900.79,475 1087.8,475
GND on Top Layer "POWER-No Net" (solid, remove dead copper, pour order 1001): -1751.99,2228.71 2250.01,2228.71 2278.01,2200.71 2256.01,2178.71 2256.01,-129.29 2256.01,-173.29 2195.01,-234.29 2190.01,-239.29 -1371.99,-239.29 -1784.99,-239.29 -1812.99,-211.29 -1751.99,-150.29 -1751.99,2228.71
GND on Bottom Layer "POWER-No Net" (solid, remove dead copper, pour order 1002): -1760,2217.39 2242,2217.39 2270,2189.39 2248,2167.39 2248,-140.61 2248,-184.61 2187,-245.61 2182,-250.61 -1380,-250.61 -1793,-250.61 -1821,-222.61 -1760,-161.61 -1760,2217.39
GND on Bottom Layer "POWER-No Net" (solid, remove dead copper, pour order 1001): 1029.78,297.73 1033.05,301 1145,301 1145,296 1161,280 1172,269 1172,188.06 1172,169 1161,158 1158,155 1089,155 1024,155 1010,169 1009,170 1009,200 1009,234 1016,241 1016,254 1016,284.61 1029.13,297.73
GND on GND (split plane): 2216.23,-173.11 -1680.59,-173.11 -1680.59,2148.9 2216.23,2148.9

## Keep-outs
Keep-Out Layer:
  lines w5: -1690.68,-181 2224.32,-181 2224.32,2159 -1690.68,2159 -1690.68,-181

## Other copper
Top Layer:
  rectangle net VCC_LTE_3.8V: 1510,566 1575,1684
  rectangle net VCC_LTE_3.8V: 1325.32,1638 1675,1752
  rectangle net VCC_LTE_3.8V: 1512,1715 1574,1862
  rectangle net VCC_LTE_3.8V: 1455,445 1728,606
  rectangle net VCC_OUT: -623,1864 -461,2024
  rectangle net VCC_OUT: -516,1960 -411,2024
  rectangle net VCC_OUT: -72,-114 108,-30
  rectangle net NetQ5_3: -243,103 -186,320
  rectangle net NetC40_1: -940,971 -859,1104
  rectangle net Net3.3V_1: -1160,808 -1118,995
  rectangle net Net3.3V_1: -1207,897 -1140,995
  rectangle net Net3.3V_1: -1140,899 -1080,995
  rectangle net GND: -1102.71,660.74 -1027.1,864.65
  rectangle net GND: -834,1560 -759,1715
  region net NetC37_1: -745.95,1930.05 -752,1924 -752,1773 -733,1754 -733,1720 -724,1711 -632,1711 -600,1679 -462,1679 -454.05,1686.95 -454.05,1782.05 -466,1794 -635,1794 -653.02,1812.02 -653.02,1920.08 -663,1930.05
  region net GND: -903,1917 -822,1917 -818,1913 -818,1819 -757,1758 -757,1680 -764,1673 -827,1673 -834,1680 -834,1750 -856,1772 -896,1772 -904,1780 -904,1916
  region net NetC40_1: -916,87 -547,87 -531,103 -531,355 -542,366 -650,366 -656,360 -655,359 -655,252 -691,216 -913,216 -928,201 -928,99
  region net NetC105_2: 20,318 20,195 34,181 115,181 124,172 124,65 110,51 -64,51 -78,65 -78,312 -72,318
  region net NetL17_2: -369,190 -369,103 -357,91 -291,91 -289,89 -289,64 -295,58 -444,58 -466,80 -466,182 -458,190
  region net NetC63_1: -869,1688 -863,1682 -863,1669 -873,1659 -1112,1659 -1131,1640 -1131,1283 -1208,1206 -1300,1206 -1309,1215 -1309,1346.38 -1293.38,1362 -1209,1362 -1188,1383 -1188,1663 -1163,1688
  region net POWER: -1024,1189 -839,1189 -839,1294 -836,1297 -814,1297 -812,1295 -812,1218 -808,1214 -748,1214 -739,1223 -739,1296 -735,1300 -711,1300 -708,1297 -708,1136 -717,1127 -1031,1127 -1038,1134 -1038,1175
  region net VCC_OUT: -790,1061 -697,1061 -680,1078 -680,1115 -671,1124 -620,1124 -611,1115 -611,1018 -633,996 -787,996 -796,1005 -796,1055
  region net NetL11_2: -1009,801 -968,801 -955,788 -835,788 -835,756 -964.92,756 -976,748 -1007,748 -1010,751 -1010,800
  region net NetL11_1: -1012,810 -970,810 -897,883 -837,883 -828,892 -828,924 -836,932 -917,932 -937,912 -937,880 -975,842 -1008,842 -1012,838
  region net POWER: -1120,751 -1123,748 -1157,748 -1170,761 -1171,760 -1256,760 -1256,802 -1123,802 -1120,799
POWER:
  rectangle net VCC_LTE_3.8V: 1511,1696 1573,1829
  rectangle net VCC_LTE_3.8V: 1289,1614 1679,1752
  rectangle net VCC_OUT: -79,-125 15,127
  rectangle net POWER: -924,1128 -727,1219
  rectangle net NetC40_1: -938,969 -855,1104
Bottom Layer:
  rectangle net VCC_LTE_3.8V: 1189,1639 1676,1752
  rectangle net VCC_LTE_3.8V: 1455,446 1724.32,606
  rectangle net Net3.8V_1: -486,436 -413,815
  rectangle net Net3.8V_1: -616,436 -469,473
  rectangle net VCC_OUT: -645,1868 -352,2024
  rectangle net VCC_MCU_3.3V: -1121,46.26 -1031.35,81
  rectangle net POWER: -1334,743 -1159,810
  rectangle net VCC_OUT: -698,995 -612,1092
  rectangle net VCC_MCU_3.3V: -1071,902 -982,1004
  rectangle net VCC_LTE_3.8V: -430,846 -354,929
  rectangle net Net3.8V_1: -487,761 -438,932
  rectangle net POWER: -1333,760 -1169,803
  rectangle net Net3.3V_1: -1329,890 -1125,998
  rectangle net Net3.3V_1: -1161,832 -1125,899
  rectangle net Net3.3V_1: -1134,899 -1080,998
  rectangle net NetC93_1: -1596,1484 -1498,1937
  rectangle net NetAdapter_1: -1398,1384 -1233,1502
  rectangle net NetC93_1: -1597,1164.34 -1497,1543
  rectangle net NetC93_1: -1513,1198 -1402.68,1312
  rectangle net NetU13_79: -1455,1555 -1156,1653.31
  rectangle net NetC63_1: -1355,1211 -1211,1340
  rectangle net GND: -769,494.12 -555.51,567
  region net VCC_DEV: -1511,431 -1449,493 -1399,493 -1389,503 -1389,552 -1398,561 -1445,561 -1482,524 -1589,524 -1604,509 -1604,443 -1592,431
  region net NetL10_2: -674,583 -630,583 -626,587 -626,662 -669,705 -669,770 -672,773 -701,773 -705,769 -705,686 -678,659 -678,587
  region net NetL10_1: -573,772 -576,769 -576,708 -619,665 -619,587 -615,583 -589,583 -585,587 -585,629 -536,678 -536,769 -539,772
  region net Net3.8V_1: -616,473 -555,473 -508,520 -482,520 -482,420 -533,420 -549,436 -616,436
  region net POWER: -676,473 -627,473 -625,471 -625,424 -609,408 -533,408 -527,402 -527,334 -633,334 -653,354 -653,401 -669,401 -678,410 -678,471

## Silkscreen, mask and mechanical layers (free items; w line width, h text height)
Top Overlay:
  lines w5: -1188,138 -1035,138 -1035,580 -1188,580 -1188,138
  lines w15: 862.32,352 862.32,13 1626.09,13 1626.09,73.65 ; 862.32,529.32 862.32,599.61 1626.09,599.61 ; 1626.09,275 1626.09,396
  text "+: DC 6--36V" at -1497,2055 h30
  text "-" at -1116,1718 h30 r90
  text "+" at -1160,1400 h30
  text "GAS" at -1160,537 h30
  text "G" at -1160,494 h30
  text "MOTO" at -1160,449 h30
  text "3.3V" at -1163,408 h30
  text "G" at -1159,364 h30
  text "DQ" at -1159,319 h30
  text "3.3V" at -1162,278 h30
  text "G" at -1161,234 h30
  text "RX" at -1157,190 h30
  text "TX" at -1160,145 h30
  text "+" at -1369,141 h30
Top Solder:
  lines w20: 862.32,403 862.32,495 ; 900,13 1003,13 ; 1369,13 1466,13 ; 1382,599.61 1429,599.61 ; 1626.09,123 1626.09,245 ; 1626.09,439 1626.09,525
Mechanical 1:
  the board outline again, w5

## Text inside footprints (layer, text, board x,y; h text height)
1: Top Overlay "+" at 2440.32,-63 h60 r90
433: Top Overlay "+" at 2192.32,722 h30 r180
BACK: Top Overlay "+" at 2192.32,72 h30 r180
GPS: Top Overlay "+" at 2192.32,397 h30 r180
PWR: Top Overlay "+" at 2192.32,234.5 h30 r180
SB: Bottom Overlay "+" at -93.68,1161 h30